# EAGLE board Mickoflus (EAGLE 6.5.0)

Size 100 x 100 mm. Coordinates in mm from the lower left corner, seen from the top.
Outline: 0,0 100,0 100,100 0,100 0,0
Copper layers (1*16): Top 0.035mm / dielectric 1.5mm / Bottom 0.035mm
Design rules "default": minimum track width 10mil, minimum drill 24mil, track to track 8mil, track to pad 8mil, pad to pad 8mil, via to via 8mil, smd to smd 8mil, copper to edge 40mil, drill to drill 8mil, minimum pad ring 10mil, minimum via ring 8mil, stop-mask expansion 4mil, vias tented up to drill 0mil, thermal gap 10mil

## Footprints (pad centres in the part's own frame; a part is rotated, then mirrored left to right if it is on the bottom)
C1206 = smd 1.6 x 1.8: 1 -1.4,0; 2 1.4,0
D0805 = smd 1.3 x 1.5: A -0.95,0; C 0.95,0
DO41-10 = drill 1.118: A 5.08,0; C -5.08,0
SO16 = smd 0.66 x 2.032: 1 -4.445,-3.073; 2 -3.175,-3.073; 3 -1.905,-3.073; 4 -0.635,-3.073; 5 0.635,-3.073; 6 1.905,-3.073; 7 3.175,-3.073; 8 4.445,-3.073; 9 4.445,3.073; 10 3.175,3.073; 11 1.905,3.073; 12 0.635,3.073; 13 -0.635,3.073; 14 -1.905,3.073; 15 -3.175,3.073; 16 -4.445,3.073
78XXS = drill 1.016 long: GND 0,-2.54; IN -2.54,-2.54; OUT 2.54,-2.54
DEVKITC = drill 0.8: 1 -12.7,46.99; 2 -12.7,44.45; 3 -12.7,41.91; 4 -12.7,39.37; 5 -12.7,36.83; 6 -12.7,34.29; 7 -12.7,31.75; 8 -12.7,29.21; 9 -12.7,26.67; 10 -12.7,24.13; 11 -12.7,21.59; 12 -12.7,19.05; 13 -12.7,16.51; 14 -12.7,13.97; 15 -12.7,11.43; 16 -12.7,8.89; 17 -12.7,6.35; 18 -12.7,3.81; 19 -12.7,1.27; 20 12.7,1.27; 21 12.7,3.81; 22 12.7,6.35; 23 12.7,8.89; 24 12.7,11.43; 25 12.7,13.97; 26 12.7,16.51; 27 12.7,19.05; 28 12.7,21.59; 29 12.7,24.13; 30 12.7,26.67; 31 12.7,29.21; 32 12.7,31.75; 33 12.7,34.29; 34 12.7,36.83; 35 12.7,39.37; 36 12.7,41.91; 37 12.7,44.45; 38 12.7,46.99
1X04 = drill 1.016 long: 1 -3.81,0; 2 -1.27,0; 3 1.27,0; 4 3.81,0
1X06 = drill 1.016 long: 1 -6.35,0; 2 -3.81,0; 3 -1.27,0; 4 1.27,0; 5 3.81,0; 6 6.35,0
2X16 = drill 1.016 octagon: 1 -19.05,-1.27; 2 -19.05,1.27; 3 -16.51,-1.27; 4 -16.51,1.27; 5 -13.97,-1.27; 6 -13.97,1.27; 7 -11.43,-1.27; 8 -11.43,1.27; 9 -8.89,-1.27; 10 -8.89,1.27; 11 -6.35,-1.27; 12 -6.35,1.27; 13 -3.81,-1.27; 14 -3.81,1.27; 15 -1.27,-1.27; 16 -1.27,1.27; 17 1.27,-1.27; 18 1.27,1.27; 19 3.81,-1.27; 20 3.81,1.27; 21 6.35,-1.27; 22 6.35,1.27; 23 8.89,-1.27; 24 8.89,1.27; 25 11.43,-1.27; 26 11.43,1.27; 27 13.97,-1.27; 28 13.97,1.27; 29 16.51,-1.27; 30 16.51,1.27; 31 19.05,-1.27; 32 19.05,1.27
1X16 = drill 1.016 long: 1 -19.05,0; 2 -16.51,0; 3 -13.97,0; 4 -11.43,0; 5 -8.89,0; 6 -6.35,0; 7 -3.81,0; 8 -1.27,0; 9 1.27,0; 10 3.81,0; 11 6.35,0; 12 8.89,0; 13 11.43,0; 14 13.97,0; 15 16.51,0; 16 19.05,0
1X01 = drill 1.016 octagon: 1 0,0
W237-132 = drill 1.194 long: 1 -2.54,-0.635; 2 2.54,-0.635
SOT23 = smd 1 x 1.4: 1 -0.95,-1.1; 2 0.95,-1.1; 3 0,1.1
R1206 = smd 1.6 x 1.803: 1 -1.422,0; 2 1.422,0
SJ = smd 1.168 x 1.6: 1 -0.762,0; 2 0.762,0
PINHEAD = drill 1.016 octagon: !SLEEP 1.27,13.97; GND 21.59,8.89; IN1 21.59,1.27; IN2 21.59,3.81; IN3 21.59,11.43; IN4 21.59,13.97; OUT1 1.27,11.43; OUT2 1.27,8.89; OUT3 1.27,6.35; OUT4 1.27,3.81; ULT 1.27,1.27; VCC 21.59,6.35
LED4_1206 = smd 1.6 x 1.803: G2 9.042,6.35; G3 9.042,3.81; G4 9.042,1.27; GND 9.042,8.89; I11 1.118,8.89; I22 1.118,6.35; I33 1.118,3.81; I44 1.118,1.27; T1 3.962,8.89; T2 3.962,6.35; T3 3.962,3.81; T4 3.962,1.27; T5 6.198,8.89; T6 6.198,6.35; T7 6.198,3.81; T8 6.198,1.27 | drill 0.8: I1 -0.635,8.89; I2 -0.635,6.35; I3 -0.635,3.81; I4 -0.635,1.27; O1 11.113,8.89; O2 11.113,6.35; O3 11.113,3.81; O4 11.113,1.27

## Placement (x,y rotation side)
C1  100n  [C1206]  -2.54,-6.35 0 top  (outside the outline)
C2  100n  [C1206]  -2.54,-12.7 0 top  (outside the outline)
D1  [D0805]  -3.81,-27.94 0 top  (outside the outline)
D2  1N4004  [DO41-10]  1.27,-124.46 0 top  (outside the outline)
IC1  74HC595D  [SO16]  31.75,68.58 0 top
IC2  74HC595D  [SO16]  64.77,68.58 0 top
IC4  [78XXS]  0,-114.3 0 top  (outside the outline)
IM1  DEVKITC  [DEVKITC]  81.28,27.94 90 top
JP1  [1X04]  13.97,86.36 0 top
JP2  [1X06]  2.54,80.01 90 top
JP3  [1X06]  97.79,80.01 90 top
JP4  [1X04]  24.13,83.82 0 top
JP5  [1X04]  34.29,86.36 0 top
JP6  [1X04]  44.45,83.82 0 top
JP7  [1X04]  54.61,86.36 0 top
JP8  [1X04]  64.77,83.82 0 top
JP9  [1X04]  74.93,86.36 0 top
JP10  [1X04]  85.09,83.82 0 top
JP11  [2X16]  55.88,6.35 0 top
JP12  [2X16]  57.15,46.99 0 top
JP13  [1X16]  55.88,10.16 180 top
JP14  [1X16]  57.15,50.8 0 top
JP15  [1X01]  2.54,-58.42 0 top  (outside the outline)
JP16  [1X01]  2.54,-73.66 0 top  (outside the outline)
JP17  [1X01]  2.54,-88.9 0 top  (outside the outline)
JP18  [1X01]  2.54,-104.14 0 top  (outside the outline)
JP19  [1X04]  1.27,-132.08 0 top  (outside the outline)
M1  [W237-132]  13.97,93.98 180 top
M2  [W237-132]  24.13,93.98 180 top
M3  [W237-132]  34.29,93.98 180 top
M4  [W237-132]  44.45,93.98 180 top
M5  [W237-132]  54.61,93.98 180 top
M6  [W237-132]  64.77,93.98 180 top
M7  [W237-132]  74.93,93.98 180 top
M8  [W237-132]  85.09,93.98 180 top
POWER1  [W237-132]  3.81,93.98 270 top
POWER2  [W237-132]  95.25,93.98 90 top
Q1  [SOT23]  -2.54,-20.32 0 top  (outside the outline)
R1  10k  [R1206]  -2.54,-34.29 0 top  (outside the outline)
R2  10k  [R1206]  -2.54,-40.64 0 top  (outside the outline)
R3  10k  [R1206]  -2.54,-46.99 0 top  (outside the outline)
R4  [R1206]  -2.54,-137.16 0 top  (outside the outline)
R5  [R1206]  -2.54,-142.24 0 top  (outside the outline)
SJ2  [SJ]  17.78,40.64 0 top
SJ3  [SJ]  17.78,35.56 0 top
U$1  DRV8833_BOARD  [PINHEAD]  12.7,81.28 270 top
U$2  DRV8833_BOARD  [PINHEAD]  33.02,81.28 270 top
U$3  DRV8833_BOARD  [PINHEAD]  52.07,81.28 270 top
U$4  DRV8833_BOARD  [PINHEAD]  71.12,81.28 270 top
U$5  4LED  [LED4_1206]  124.46,55.88 0 top  (outside the outline)
U$6  4LED  [LED4_1206]  134.62,157.48 90 top  (outside the outline)
U$7  4LED  [LED4_1206]  124.46,140.97 0 top  (outside the outline)
U$8  4LED  [LED4_1206]  124.46,127 0 top  (outside the outline)
U$9  4LED  [LED4_1206]  124.46,113.03 0 top  (outside the outline)
U$10  4LED  [LED4_1206]  124.46,99.06 0 top  (outside the outline)
U$11  4LED  [LED4_1206]  124.46,85.09 0 top  (outside the outline)
U$12  4LED  [LED4_1206]  124.46,71.12 0 top  (outside the outline)

## Library data of the parts
C1 C2 R1-R3 = rcl_upravena
D1 D2 = diode
IC1 IC2 = 74xx-eu
IC4 = v-reg
IM1 = esp32
JP1-JP19 = pinhead
M1-M8 POWER1 POWER2 = con-wago-508; OC_FARNELL: unknown; OC_NEWARK: unknown
Q1 = transistors
R4 R5 = resistor
SJ2 SJ3 = jumper
U$1-U$4 = DRV8833board
U$5-U$12 = 4LED

## Nets
!FAULT0: JP15.1 U$1.ULT
!FAULT1: JP16.1 U$2.ULT
!FAULT2: JP17.1 U$3.ULT
!FAULT3: JP18.1 U$4.ULT
+3V3: C1.1 C2.1 IC1.16 IC2.16 IM1.1 JP2.6 JP3.1 JP19.3 Q1.1 R1.2 R3.2 R4.2 R5.2 SJ2.2
+5V: IC4.OUT IM1.19 JP1.4 JP4.4 JP5.4 JP6.4 JP7.4 JP8.4 JP9.4 JP10.4 SJ3.2
_EN_: D1.C Q1.3
EN: IC1.10 IC2.10 IM1.2 JP2.2 JP3.5 Q1.2 R3.1 U$1.!SLEEP U$2.!SLEEP U$3.!SLEEP U$4.!SLEEP
ENC1A: IM1.31 JP9.1 JP13.1
ENC1B: IM1.30 JP9.2 JP13.2
ENC2A: IM1.29 JP10.1 JP13.3
ENC2B: IM1.28 JP10.2 JP13.4
ENC3A: IM1.27 JP8.1 JP13.5
ENC3B: IM1.26 JP8.2 JP13.6
ENC4A: IM1.15 JP7.1 JP13.7
ENC4B: IM1.13 JP7.2 JP13.8
ENC5A: IM1.12 JP5.1 JP13.9
ENC5B: IM1.11 JP5.2 JP13.10
ENC6A: IM1.10 JP6.1 JP13.11
ENC6B: IM1.9 JP6.2 JP13.12
ENC7A: IM1.8 JP4.1 JP13.13
ENC7B: IM1.7 JP4.2 JP13.14
ENC8A: IM1.6 JP1.1 JP13.15
ENC8B: IM1.5 JP1.2 JP13.16
GND: C1.2 C2.2 IC1.8 IC1.13 IC2.8 IC2.13 IC4.GND IM1.14 IM1.32 IM1.38 JP1.3 JP2.5 JP3.2 JP4.3 JP5.3 JP6.3 JP7.3 JP8.3 JP9.3 JP10.3 JP11.2 JP11.4 JP11.6 JP11.8 JP11.10 JP11.12 JP11.14 JP11.16 JP11.18 JP11.20 JP11.22 JP11.24 JP11.26 JP11.28 JP11.30 JP11.32 JP12.2 JP12.4 JP12.6 JP12.8 JP12.10 JP12.12 JP12.14 JP12.16 JP12.18 JP12.20 JP12.22 JP12.24 JP12.26 JP12.28 JP12.30 JP12.32 JP19.4 POWER1.2 POWER2.2 R2.1 U$1.GND U$2.GND U$3.GND U$4.GND U$5.GND U$6.GND U$7.GND U$8.GND U$9.GND U$10.GND U$11.GND U$12.GND
IO6_NC: IM1.20
IO7_NC: IM1.21
IO8_NC: IM1.22
IO9_NC: IM1.16
IO10_NC: IM1.17
IO11_NC: IM1.18
IO21: IM1.33
IO22: JP14.9
IO23: JP14.10
IO36: IM1.3 JP14.11
IO39: IM1.4 JP14.12
N$1: IC1.9 IC2.14
N$2: M8.2 U$9.O1
N$3: IC2.9 JP3.3
N$4: JP11.1 JP11.3 JP11.5 JP11.7 JP11.9 JP11.11 JP11.13 JP11.15 JP11.17 JP11.19 JP11.21 JP11.23 JP11.25 JP11.27 JP11.29 JP11.31 JP12.1 JP12.3 JP12.5 JP12.7 JP12.9 JP12.11 JP12.13 JP12.15 JP12.17 JP12.19 JP12.21 JP12.23 JP12.25 JP12.27 JP12.29 JP12.31 SJ2.1 SJ3.1
N$5: D2.C IC4.IN
N$7: U$1.IN1 U$5.O1
N$8: U$1.IN2 U$5.O2
N$9: U$1.IN3 U$5.O3
N$10: U$1.IN4 U$5.O4
N$11: IC1.15 U$5.I1
N$12: IC1.1 U$5.I2
N$13: IC1.2 U$5.I3
N$14: IC1.3 U$5.I4
N$15: M8.1 U$9.O2
N$17: IC1.4 U$6.I1
N$18: IC1.5 U$6.I2
N$19: IC1.6 U$6.I3
N$20: IC1.7 U$6.I4
N$21: IC2.15 U$7.I1
N$22: IC2.1 U$7.I2
N$23: IC2.2 U$7.I3
N$24: IC2.3 U$7.I4
N$27: M4.2 U$9.O3
N$28: M4.1 U$9.O4
N$29: M1.2 U$10.O1
N$30: M1.1 U$10.O2
N$31: M2.2 U$10.O3
N$32: M2.1 U$10.O4
N$33: M5.2 U$11.O1
N$34: M5.1 U$11.O2
N$35: M6.2 U$11.O3
N$36: M6.1 U$11.O4
N$37: M3.2 U$12.O1
N$38: M3.1 U$12.O2
N$39: M7.2 U$12.O3
N$40: M7.1 U$12.O4
N$59: JP14.13
N$60: JP14.14
N$61: JP14.15
N$62: JP14.16
N$72: U$2.IN1 U$6.O1
N$73: U$2.IN2 U$6.O2
N$74: U$2.IN3 U$6.O3
N$75: U$2.IN4 U$6.O4
N$76: U$3.IN1 U$7.O1
N$77: U$3.IN2 U$7.O2
N$78: U$3.IN3 U$7.O3
N$79: U$3.IN4 U$7.O4
N$80: IC2.4 U$8.I1
N$81: IC2.5 U$8.I2
N$82: IC2.6 U$8.I3
N$83: IC2.7 U$8.I4
N$84: U$4.IN1 U$8.O1
N$85: U$4.IN2 U$8.O2
N$86: U$4.IN3 U$8.O3
N$87: U$4.IN4 U$8.O4
N$88: U$4.OUT4 U$12.I4
N$89: U$4.OUT3 U$12.I3
N$90: U$4.OUT2 U$12.I2
N$91: U$4.OUT1 U$12.I1
N$92: U$3.OUT4 U$11.I4
N$93: U$3.OUT3 U$11.I3
N$94: U$3.OUT2 U$11.I2
N$95: U$3.OUT1 U$11.I1
N$96: U$2.OUT4 U$10.I4
N$97: U$2.OUT3 U$10.I3
N$98: U$2.OUT2 U$10.I2
N$99: U$2.OUT1 U$10.I1
N$100: U$1.OUT4 U$9.I4
N$101: U$1.OUT3 U$9.I3
N$102: U$1.OUT2 U$9.I2
N$103: U$1.OUT1 U$9.I1
RCKMOT: D1.A IC1.12 IC2.12 IM1.25 JP2.3 JP3.4 R1.1
RXD0: IM1.34 JP14.1
SCKMOT: IC1.11 IC2.11 IM1.23 JP2.1 JP3.6
SCL: IM1.36 JP19.1 R4.1
SDA: IM1.37 JP19.2 R5.1
SERMOT: IC1.14 IM1.24 JP2.4 R2.2
TXD0: IM1.35 JP14.2
VCC: D2.A POWER1.1 POWER2.1 U$1.VCC U$2.VCC U$3.VCC U$4.VCC

## Tracks (layer width: path | path; a pad name or v marks a point on that pad's centre or on a via)
!FAULT0  (1 unrouted)
!FAULT1  (1 unrouted)
!FAULT2  (1 unrouted)
!FAULT3  (1 unrouted)
+3V3  (13 unrouted)
+5V  (10 unrouted)
_EN_  (1 unrouted)
EN  (10 unrouted)
ENC1A  (2 unrouted)
ENC1B  (2 unrouted)
ENC2A  (2 unrouted)
ENC2B  (2 unrouted)
ENC3A  (2 unrouted)
ENC3B  (2 unrouted)
ENC4A  (2 unrouted)
ENC4B  (2 unrouted)
ENC5A  (2 unrouted)
ENC5B  (2 unrouted)
ENC6A  (2 unrouted)
ENC6B  (2 unrouted)
ENC7A  (2 unrouted)
ENC7B  (2 unrouted)
ENC8A  (2 unrouted)
ENC8B  (2 unrouted)
GND  (67 unrouted)
IO36  (1 unrouted)
IO39  (1 unrouted)
N$1  (1 unrouted)
N$2  (1 unrouted)
N$3  (1 unrouted)
N$4  (33 unrouted)
N$5  (1 unrouted)
N$7  (1 unrouted)
N$8  (1 unrouted)
N$9  (1 unrouted)
N$10  (1 unrouted)
N$11  (1 unrouted)
N$12  (1 unrouted)
N$13  (1 unrouted)
N$14  (1 unrouted)
N$15  (1 unrouted)
N$17  (1 unrouted)
N$18  (1 unrouted)
N$19  (1 unrouted)
N$20  (1 unrouted)
N$21  (1 unrouted)
N$22  (1 unrouted)
N$23  (1 unrouted)
N$24  (1 unrouted)
N$27  (1 unrouted)
N$28  (1 unrouted)
N$29  (1 unrouted)
N$30  (1 unrouted)
N$31  (1 unrouted)
N$32  (1 unrouted)
N$33  (1 unrouted)
N$34  (1 unrouted)
N$35  (1 unrouted)
N$36  (1 unrouted)
N$37  (1 unrouted)
N$38  (1 unrouted)
N$39  (1 unrouted)
N$40  (1 unrouted)
N$72  (1 unrouted)
N$73  (1 unrouted)
N$74  (1 unrouted)
N$75  (1 unrouted)
N$76  (1 unrouted)
N$77  (1 unrouted)
N$78  (1 unrouted)
N$79  (1 unrouted)
N$80  (1 unrouted)
N$81  (1 unrouted)
N$82  (1 unrouted)
N$83  (1 unrouted)
N$84  (1 unrouted)
N$85  (1 unrouted)
N$86  (1 unrouted)
N$87  (1 unrouted)
N$88  (1 unrouted)
N$89  (1 unrouted)
N$90  (1 unrouted)
N$91  (1 unrouted)
N$92  (1 unrouted)
N$93  (1 unrouted)
N$94  (1 unrouted)
N$95  (1 unrouted)
N$96  (1 unrouted)
N$97  (1 unrouted)
N$98  (1 unrouted)
N$99  (1 unrouted)
N$100  (1 unrouted)
N$101  (1 unrouted)
N$102  (1 unrouted)
N$103  (1 unrouted)
RCKMOT  (6 unrouted)
RXD0  (1 unrouted)
SCKMOT  (4 unrouted)
SCL  (2 unrouted)
SDA  (2 unrouted)
SERMOT  (3 unrouted)
TXD0  (1 unrouted)
VCC  (6 unrouted)